# Altium PCB PCB-DCDC.PcbDoc
Units mm, origin at the board's own origin, x right, y up, seen from the top; angles counter-clockwise.
Board outline 45.2 x 20.4 mm, 2 copper layers (Top Layer, Bottom Layer), stack 1.271 mm thick; 14 components, 10 nets, 47 pads, 136 vias.
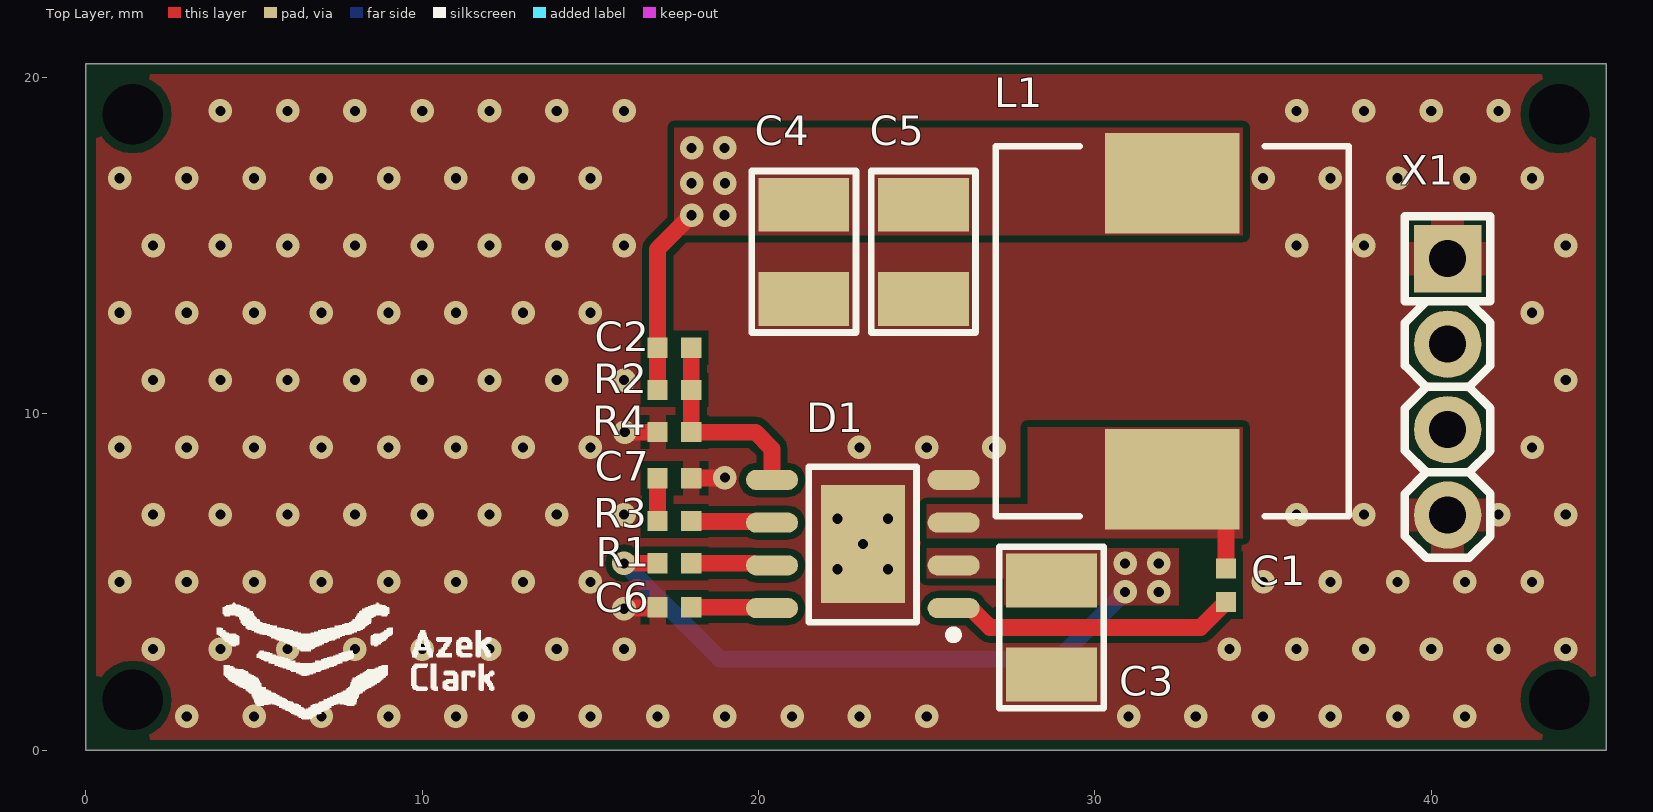
[diagram p0: Top Layer view]
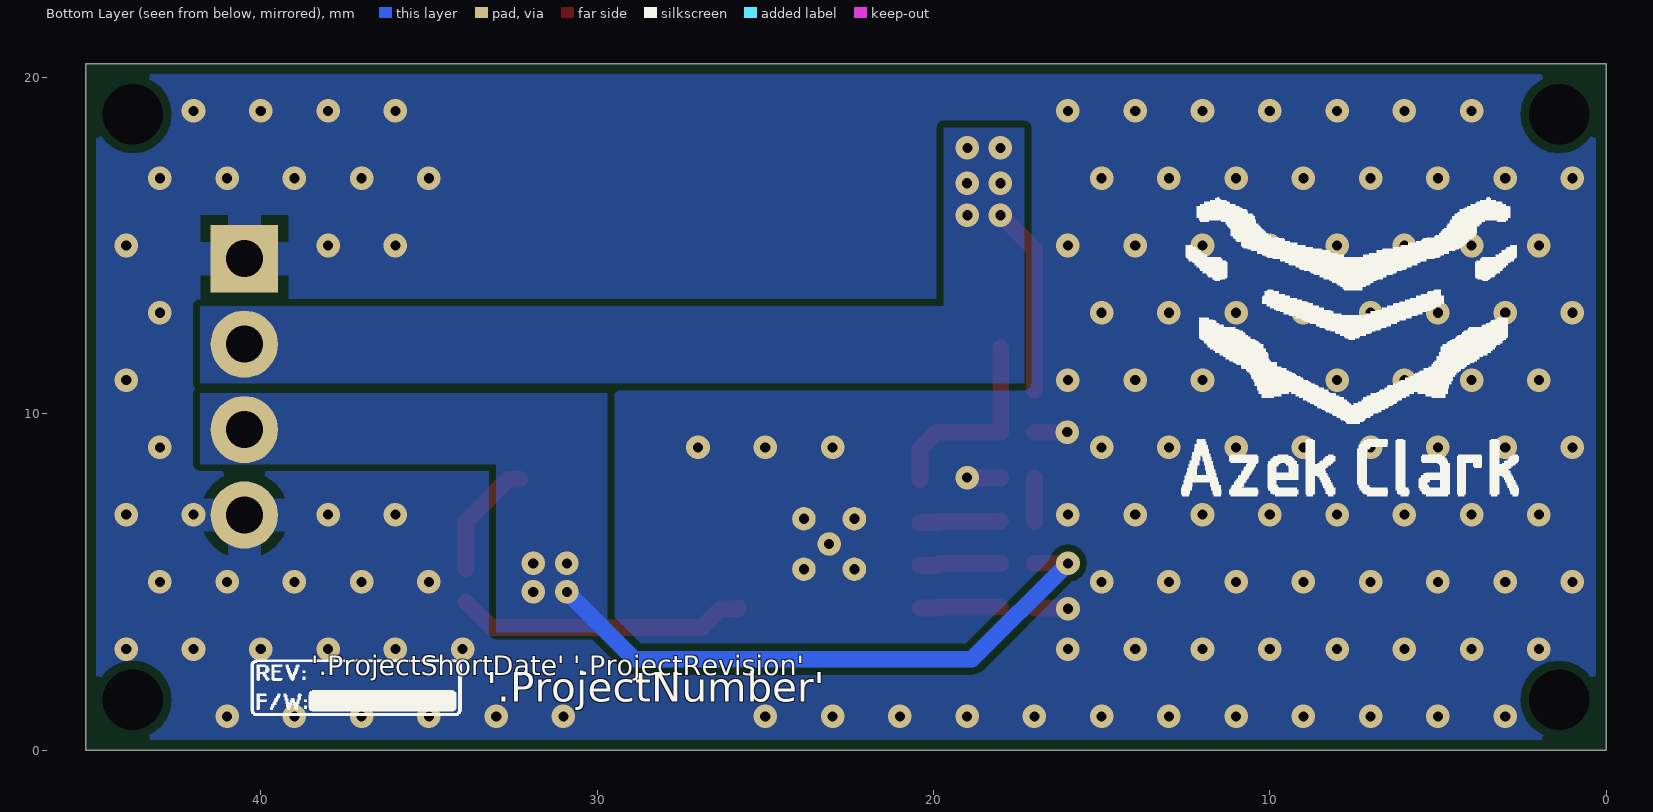
[diagram p1: Bottom Layer view, seen from below]
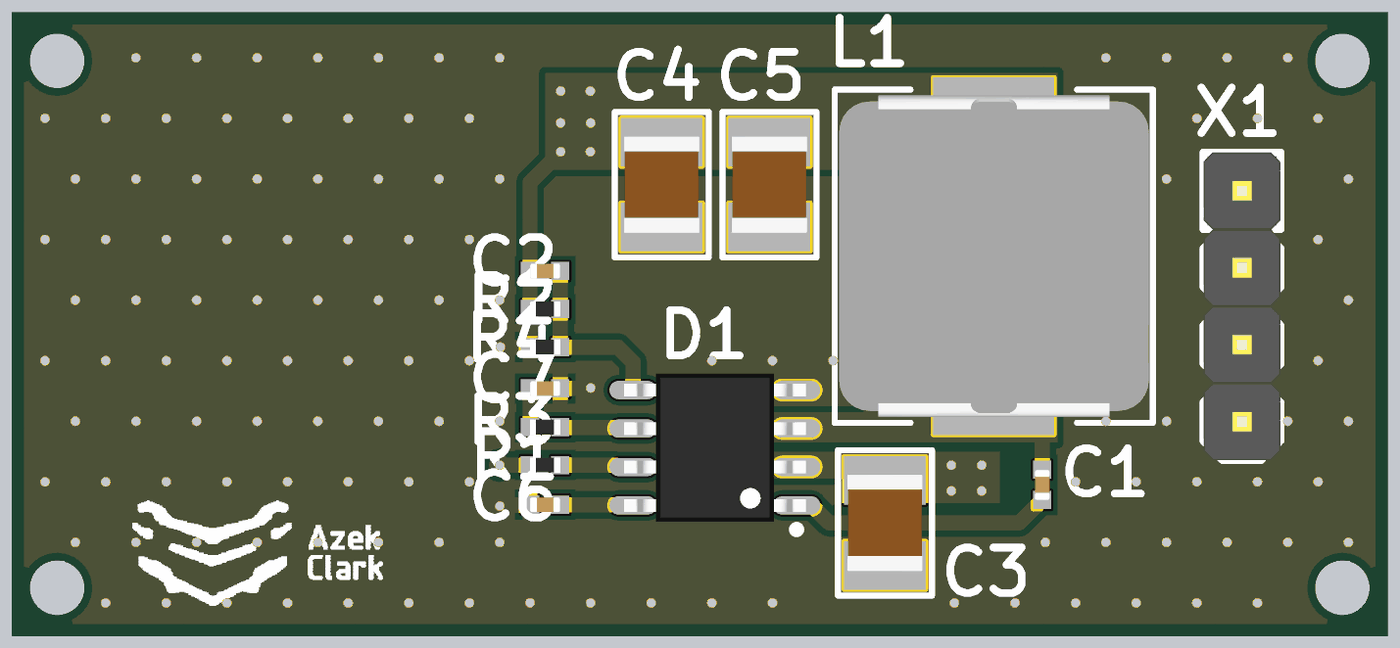
[diagram p2: 3D render of the assembled board from above, using the file's embedded part models]

## Layer stack, top to bottom
Top Solder: solder mask 0.0102, Solder Resist, Dk 3.5
Top Layer: signal copper 0.0356
Dielectric 1: dielectric 1.2, FR-4, Dk 4.8
Bottom Layer: signal copper 0.0356
Bottom Solder: solder mask 0.0102, Solder Resist, Dk 3.5

## Board outline
0,0 0,20.4 45.2,20.4 45.2,0

## Design rules (kind name [scope] priority, off if disabled: settings)
BoardOutlineClearance [All] p1: gap=0.3 ignorepadtopadclearanceinfootprint=FALSE
Clearance Clearance_NPTH [All vs InPadClass('NPTH')] p1: gap=0.4 ignorepadtopadclearanceinfootprint=FALSE except(0: Arc-Hole Track-Hole SMDPad-Hole THPad-Hole Via-Hole Fill-Hole Poly-Hole Region-Hole Text-Hole)
Clearance Clearance_MultiLayerPad [OnLayer('Multi-Layer') and IsPad] p2: gap=0.25 ignorepadtopadclearanceinfootprint=FALSE except(0: Arc-Hole Track-Hole SMDPad-Hole THPad-Hole Via-Hole Fill-Hole Poly-Hole Region-Hole Text-Hole)
Clearance Clearance_Polygon [InPolygon] p3: gap=0.2 ignorepadtopadclearanceinfootprint=FALSE except(0: Arc-Hole Track-Hole SMDPad-Hole THPad-Hole Via-Hole Fill-Hole Poly-Hole Region-Hole Text-Hole)
Clearance [All] p4: gap=0.15 ignorepadtopadclearanceinfootprint=FALSE except(0: Arc-Hole Track-Hole SMDPad-Hole THPad-Hole Via-Hole Fill-Hole Poly-Hole Region-Hole Text-Hole)
DiffPairsRouting [All] p1: maxlimit=0.254 minlimit=0.2 mostfreqgap=0.254 toplayer_minwidth=0.2 toplayer_maxwidth=0.5 toplayer_prefwidth=0.3 bottomlayer_minwidth=0.2 bottomlayer_maxwidth=0.5 bottomlayer_prefwidth=0.3 maxuncoupledlength=12.7
Height [All] p1: minheight=0 maxheight=60 prefheight=12.7
HoleSize [All] p1: absolutevalues=TRUE maxlimit=5 minlimit=0.025 maxpercent=80.000 minpercent=20.000
HoleToHoleClearance [All] p1: gap=0.2 allowstackedmicrovias=TRUE
MatchedLengths MatchedLengths_RMII [InNetClass('RMII')] p1: tolerance=2.54 checknetsindiffpair=FALSE checkdiffpairvsdiffpair=TRUE checkxsignals=TRUE checkothers=TRUE
MinimumSolderMaskSliver [All] p1: minsoldermaskwidth=0.05
PlaneClearance [All] p1: clearance=0.5
PlaneConnect [All] p1: planeconnectstyle=Relief reliefexpansion=0.5 reliefentries=4 reliefconductorwidth=0.3 reliefairgap=0.2
PolygonConnect PolygonConnect_PowerPAD [All vs InPadClass('PowerPAD')] p1: connectstyle=Relief reliefconductorwidth=1 reliefentries=4 polygonreliefangle="90 Angle" airgapwidth=0.3
PolygonConnect PolygonConnect_PadGND [InNet('GND') and IsPad] p2: connectstyle=Relief reliefconductorwidth=0.5 reliefentries=4 polygonreliefangle="90 Angle" airgapwidth=0.2
PolygonConnect PolygonConnect_Via [IsVia] p3: connectstyle=Direct reliefconductorwidth=0.254 reliefentries=4 polygonreliefangle="90 Angle" airgapwidth=0.254
PolygonConnect [All] p4: connectstyle=Relief reliefconductorwidth=0.6 reliefentries=4 polygonreliefangle="90 Angle" airgapwidth=0.3
RoomDefinition Board-DCDC [InComponentClass('Board-DCDC')] p1: confinementstyle=ConfineIn formatcopy=TRUE lockcomponents=FALSE outline 4.8,0.3 44.5,0.3 44.5,19.05 4.8,19.05
RoutingVias [All] p1: holewidth=0.3 width=0.7 viastyle="Through Hole" minholewidth=0.3 minwidth=0.7 maxholewidth=0.5 maxwidth=1.2
SilkToSilkClearance [All] p1: silktosilkclearance=0
SilkToSolderMaskClearance [IsPad] p1: minsilkscreentomaskgap=0.05 clearancetoexposedcopper=TRUE
SolderMaskExpansion [All] p1: expansion=0.075 istentingtop=FALSE
Width [All] p1: maxlimit=10 minlimit=0.15 preferedwidth=0.15
21 further rules are at their usual default settings.

## Components (designator, comment, footprint, x,y, rotation, side; value= is the part's Value field where it differs from the comment)
C1 "10nF" CH0402C 33.9,4.9 r270 top
C2 "10nF" CH0402C 17.5,11.959 r180 top
C3 "10µF" CH1210C 28.71,3.643 r90 top
C4 "22µF" CH1210C 21.346,14.813 r90 top
C5 "22µF" CH1210C 24.9,14.813 r90 top
C6 "100nF" CH0402C 17.5,4.246 r0 top
C7 "3.9nF" CH0402C 17.5,8.08 r180 top
D1 "TD2786" "8-SOIC (PAD)" 23.1,6.125 r180 top
L1 "22µH" "IND: JSHC1040" 32.3,12.45 r270 top
R1 "100k" CH0402R 17.5,5.55 r180 top
R2 "43k2" CH0402R 17.5,10.705 r180 top
R3 "6k8" CH0402R 17.5,6.805 r0 top
R4 "3k6" CH0402R 17.5,9.45 r0 top
X1 "PLS-4" "CON: PLS-4" 40.489,10.797 r270 top locked

## Footprints (in the part's own frame and the unit in brackets; to place one, negate y for a bottom-side part, rotate by r counter-clockwise, add the part's x,y. Pads: shape width x height; smd on the part's side, far side on the other; paste and mask are expansions set on the pad)
"8-SOIC (PAD)" [mm]
  round 0.7 hole 0.3 mask+0.075: 0(-0.75,0.75) 0(-0.75,-0.75) 0(0,0) 0(0.75,0.75) 0(0.75,-0.75)
  rect 2.5x3.5 smd: 0(0,0)
  rrect100% 1.55x0.6 smd: 1(-2.7,1.905) 2(-2.7,0.635) 3(-2.7,-0.635) 4(-2.7,-1.905) 5(2.7,-1.905) 6(2.7,-0.635) 7(2.7,0.635) 8(2.7,1.905)
  round 0.7 on Mech1: 28(-2.395,1.8)
  silkscreen extent -2.82,-2.3 1.61,2.82, body extent -3,-2.45 3,2.45, height 1.75
CH0402C [mm]
  rect 0.6x0.6 smd: 1(-0.5,0) 2(0.5,0)
  body extent -0.5,-0.25 0.5,0.25, height 0.5
CH0402R [mm]
  rect 0.6x0.6 smd: 1(-0.5,0) 2(0.5,0)
  body extent -0.5,-0.25 0.5,0.25, height 0.34
CH1210C [mm] "Non polar chip capacitor, size 1210"
  rect 1.6x2.7 smd: 1(-1.4,0) 2(1.4,0)
  silkscreen extent -2.4,-1.55 2.4,1.55, body extent -1.6,-1.25 1.6,1.25, height 2.5
"CON: PLS-4" [mm] "PLS-40 4 pin header"
  rect 2x2 hole 1.1: 1(-3.81,0)
  round 2 hole 1.1: 2(-1.27,0) 3(1.27,0) 4(3.81,0)
  silkscreen extent -5.08,-1.27 5.08,1.27, body extent -5.08,-1.27 5.08,1.27, height 8.54
"IND: JSHC1040" [mm] "SMD inductor, 11.8x10.8x4 mm"
  rect 3x4 smd: 1(-4.4,0) 2(4.4,0)
  silkscreen extent -5.5,-5.25 5.5,5.25, body extent -5.31,-5.1 5.31,5.12, height 3.94

## Part data
C1 C2 C6: library part Capacitor, Manufacturer=CCTC, ComponentKind="X7R, 50V"
  C1 C2: HelpURL=https://lcsc.com/product-detail/Multilayer-Ceramic-Capacitors-MLCC-SMD-SMT_CCTC-TCC0402X7R103M500AT_C696856.html, Model=TCC0402X7R103M500AT
  C6: HelpURL=https://lcsc.com/product-detail/Multilayer-Ceramic-Capacitors-MLCC-SMD-SMT_CCTC-TCC0402X7R104K250AT_C466234.html, Model=TCC0402X7R104K250AT
C3 C4 C5: library part Capacitor, Manufacturer="Murata Electronics"
  C3: ComponentKind="X7R, 50V", HelpURL=https://lcsc.com/product-detail/Multilayer-Ceramic-Capacitors-MLCC-SMD-SMT_Murata-Electronics-GRM32ER71H106KA12L_C77102.html, Model=GRM32ER71H106KA12L
  C4 C5: ComponentKind="X7R, 25V", HelpURL=https://lcsc.com/product-detail/Multilayer-Ceramic-Capacitors-MLCC-SMD-SMT_Murata-Electronics-GRM32ER71E226KE15L_C21397.html, Model=GRM32ER71E226KE15L
C7: library part Capacitor, Manufacturer=YAGEO, ComponentKind="X7R, 50V", HelpURL=https://lcsc.com/product-detail/Multilayer-Ceramic-Capacitors-MLCC-SMD-SMT_YAGEO-CC0402KRX7R9BB392_C113790.html, Model=CC0402KRX7R9BB392
D1: "Step-down", Manufacturer="Techcode Semiconductor Limited", ComponentKind="30V, 3A", HelpURL=https://lcsc.com/product-detail/DC-DC-Converters_Techcode-Semicon-TD2786MR_C89599.html, Model=TD2786
L1: library part Inductor, Manufacturer=Jinlai, ComponentKind="55mOhm, 3.5A", HelpURL=https://datasheet.lcsc.com/szlcsc/1912111437_Jinlai-JSHC1040H-220M-G_C334107.pdf, Model=JSHC1040H-220M-G
R1 R3: library part Resistor, Manufacturer="Uniroyal Elec", ComponentKind=±1%
  R1: HelpURL=https://lcsc.com/product-detail/Chip-Resistor-Surface-Mount_UNI-ROYAL-Uniroyal-Elec-0402WGF1003TCE_C25741.html, Model=0402WGF1003TCE
  R3: HelpURL=https://lcsc.com/product-detail/Chip-Resistor-Surface-Mount_UNI-ROYAL-Uniroyal-Elec-0402WGF6801TCE_C25917.html, Model=0402WGF6801TCE
R2 R4: library part Resistor, Manufacturer=YAGEO, ComponentKind=±1%
  R2: HelpURL=https://lcsc.com/product-detail/Chip-Resistor-Surface-Mount_YAGEO-RC0402FR-0743K2L_C137980.html, Model=RC0402FR-0743K2L
  R4: HelpURL=https://lcsc.com/product-detail/Chip-Resistor-Surface-Mount_YAGEO-AC0402FR-073K6L_C227042.html, Model=AC0402FR-073K6L
X1: library part 4-Connector, Model=PLS-4, System=Connector

## Free pads (board coordinates)
  round 0 hole 1.8 unplated paste+0: 0(1.4,1.5) 0(1.4,18.9) 0(43.8,1.5) 0(43.8,18.9)

## Via types
v1: diameter 0.7, hole 0.3, Top Layer to Bottom Layer, tented both sides, 136 vias

## Nets (pads, with @x,y where several pads share a name; then routed paths per layer and width w, separated by ;. In a path a pad name is that pad's centre, name@x,y a point inside that pad or via, vN(x,y) a via of type N, cw(c..) or ccw(c..) an arc to the next point about the centre after c; other vN are vias at no path point)
12V: C2.2 C4.2 C5.2 L1.1 R2.2 X1.2 | length 5.6
  Top Layer w0.5: R2.2 C2.2 17,14.891 v1(18.01,15.9)
  other v1: 18.99,15.9 18.01,16.85 19,16.85 18.01,17.9 18.99,17.9
GND: C3.1 C4.1 C5.1 C6.1 C7.1 D1.0 D1.4 R4.1 X1.1 X1.4 | length 3
  Top Layer w0.5: v1(16,4.2) 16.023,4.223 16.977,4.223 C6.1 ; v1(16.023,9.45) R4.1 ; C7.1 18.01,8.09 18.99,8.09 v1(19,8.1)
  other v1: 3,1 5,1 7,1 9,1 11,1 13,1 15,1 17,1 19,1 21,1 23,1 25,1 31,1 33,1 35,1 37,1 39,1 41,1 2,3 4,3 6,3 8,3 10,3 12,3 14,3 16,3 34,3 36,3 38,3 40,3 42,3 44,3 1,5 3,5 5,5 7,5 9,5 11,5 13,5 15,5 35,5 37,5 39,5 41,5 43,5 2,7 4,7 6,7 8,7 10,7 12,7 14,7 16,7 36,7 38,7 42,7 44,7 1,9 3,9 5,9 7,9 9,9 11,9 13,9 15,9 23,9 25,9 27,9 43,9 2,11 4,11 6,11 8,11 10,11 12,11 14,11 16,11 44,11 1,13 3,13 5,13 7,13 9,13 11,13 13,13 15,13 43,13 2,15 4,15 6,15 8,15 10,15 12,15 14,15 16,15 36,15 38,15 44,15 1,17 3,17 5,17 7,17 9,17 11,17 13,17 15,17 35,17 37,17 39,17 41,17 43,17 4,19 6,19 8,19 10,19 12,19 14,19 16,19 36,19 38,19 40,19 42,19
NetC1_1: C1.1 D1.3 L1.2 | length 3.5
  Top Layer w0.5: L1.2 32.65,8.05 33.9,6.8 C1.1
NetC1_2: C1.2 D1.1 | length 8.7
  Top Layer w0.5: D1.1 25.819,4.201 26.321,4.201 26.879,3.643 33.143,3.643 C1.2
NetC2_1: C2.1 D1.5 R2.1 R4.2 | length 6
  Top Layer w0.5: C2.1 R2.1 R4.2 19.905,9.45 20.4,8.955 20.4,8.076 D1.5
NetC6_2: C6.2 D1.8 | length 2.4
  Top Layer w0.5: C6.2 19.872,4.246 19.898,4.22 D1.8
NetC7_2: C7.2 R3.1 | length 1.3
  Top Layer w0.5: R3.1 C7.2
NetD1_6: D1.6 R3.2 | length 2.4
  Top Layer w0.5: R3.2 18.04,6.805 18.05,6.795 19.863,6.795 19.898,6.76 D1.6
NetD1_7: D1.7 R1.1 | length 2.4
  Top Layer w0.5: R1.1 19.838,5.55 19.898,5.49 D1.7
VIN: C3.2 D1.2 R1.2 X1.3 | length 17.9
  Top Layer w0.5: v1(16,5.55) R1.2
  Bottom Layer w0.5: v1(16,5.55) 18.85,2.7 28.9,2.7 v1(30.9,4.7)
  other v1: 31.9,4.7 30.9,5.55 31.9,5.55
pads on no net: D1.28

## Polygon pours and split planes (outlines as drawn)
GND on Top Layer "GND_L01_P006" (solid, remove dead copper, pour order 6): 0,20.4 0,0 45.2,0 45.2,20.4
12V on Top Layer "12V_L01_P002" (solid, pour order 2): 34.4,15.3 17.5,15.3 17.5,18.5 34.4,18.5
NetC1_1 on Top Layer "NETC1_1_L01_P001" (solid, pour order 1): 25,6.3 25,7.3 28,7.3 28,9.6 34.4,9.6 34.4,6.3
VIN on Top Layer "VIN_L01_P000" (solid, pour order 0): 25,6 25,5.1 27.3,5.1 27.3,4.3 32.5,4.3 32.5,6
GND on Bottom Layer "GND_L02_P007" (solid, remove dead copper, pour order 7): 45.2,20.4 45.2,0 0,0 0,20.4
12V on Bottom Layer "12V_L02_P005" (solid, pour order 5): 41.8,10.9 17.3,10.9 17.3,18.5 19.7,18.5 19.7,13.2 41.8,13.2
VIN on Bottom Layer "VIN_L02_P004" (solid, pour order 4): 38.4,6.9
VIN on Bottom Layer "VIN_L02_P003" (solid, pour order 3): 41.8,10.6 29.7,10.6 29.7,3.5 33,3.5 33,8.5 41.8,8.5

## Silkscreen, mask and mechanical layers (free items; w line width, h text height)
Top Overlay:
  drawing of 624 lines, arcs and shapes, not listed
Bottom Overlay:
  drawing of 1602 lines, arcs and shapes, not listed
  text "'.ProjectShortDate' '.ProjectRevision'" at 38.5,2.032 h1
  text "'.ProjectNumber'" at 33.299,1.132 h1.5
Top Solder:
  region: 97,45
  region: 95,3
  region: 5,47
Board Shape:
  the board outline again, w0.2